# Altium PCB LDO_pcb.PcbDoc
Units mm, origin at the board's own origin, x right, y up, seen from the top; angles counter-clockwise.
Board outline 28.75 x 11.75 mm, 2 copper layers (Top Layer, Bottom Layer); 5 components, 3 nets, 17 pads, 4 vias.
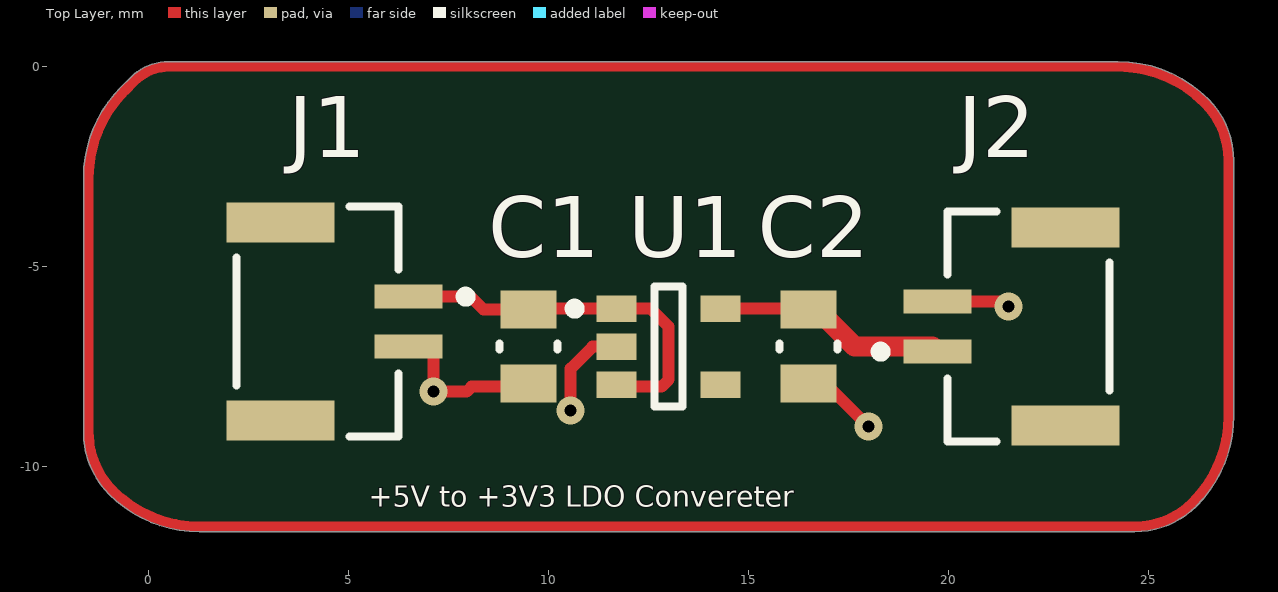
[diagram p0: Top Layer view]
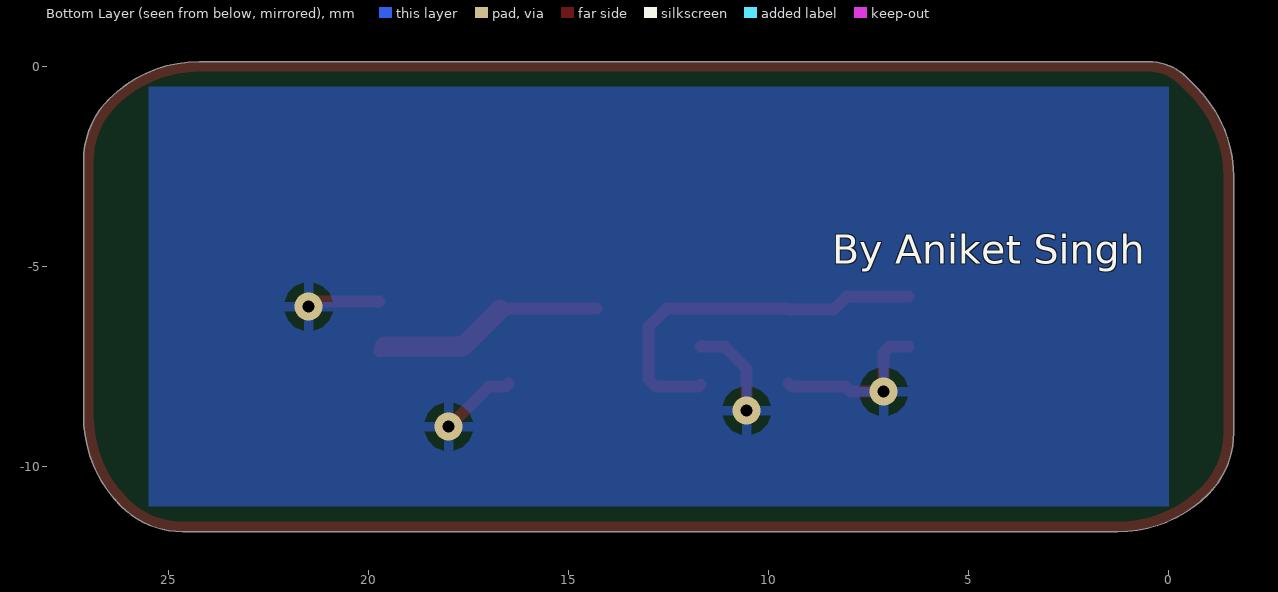
[diagram p1: Bottom Layer view, seen from below]
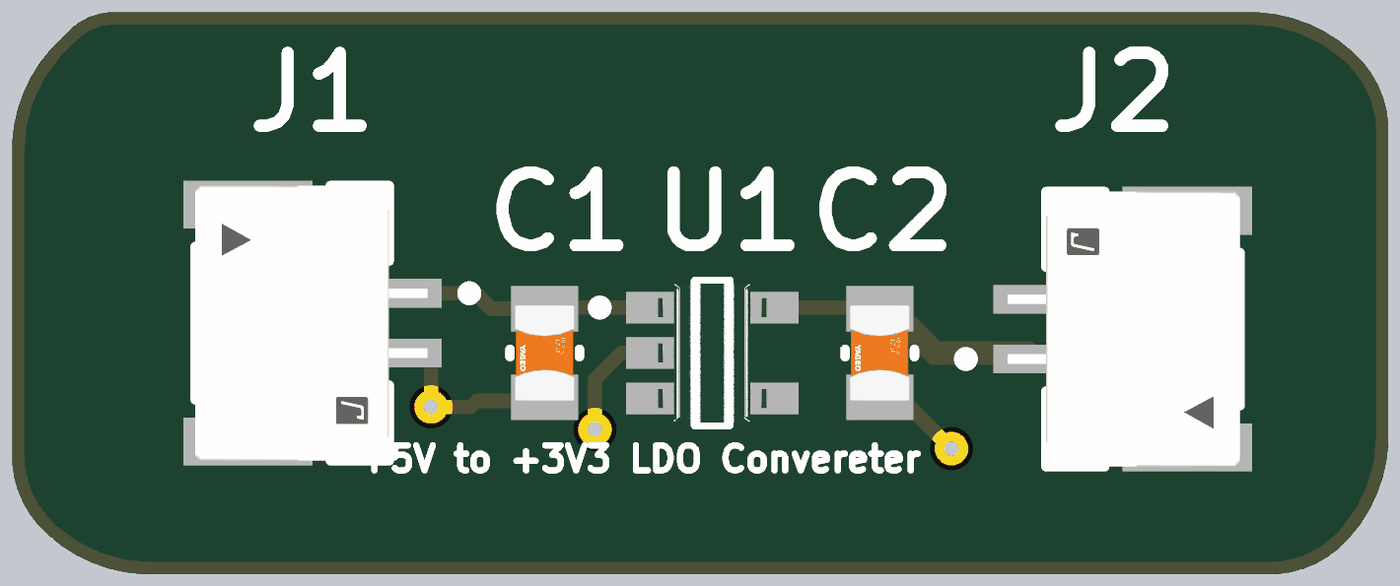
[diagram p2: 3D render of the assembled board from above, using the file's embedded part models]

## Layer stack, top to bottom
Top Solder: solder mask 0.0102, Solder Resist, Dk 3.5
Top Layer: signal copper 0.0356
Dielectric 1: dielectric 0.32, FR-4, Dk 4.8
Bottom Layer: signal copper 0.0356
Bottom Solder: solder mask 0.0102, Solder Resist, Dk 3.5

## Board outline
-1.627,-9.149 -1.627,-2.77 cw(c1.566,-2.77) -0.692,-0.512 -0.444,-0.263 cw(c0.5,-1.207) 0.5,0.127 24.23,0.127 cw(c24.23,-3.066) 26.488,-0.808 cw(c24.945,-2.351) 27.127,-2.351 27.127,-8.73 cw(c23.934,-8.73) 26.192,-10.988 cw(c24.649,-9.445) 24.649,-11.627 1.27,-11.627 cw(c1.27,-8.434) -0.988,-10.692 cw(c0.555,-9.149)

## Design rules (kind name [scope] priority, off if disabled: settings)
Clearance [All] p1: gap=0.254 ignorepadtopadclearanceinfootprint=FALSE
PolygonConnect [All] p1: connectstyle=Relief reliefconductorwidth=0.254 reliefentries=4 polygonreliefangle="90 Angle" airgapwidth=0.254
RoutingVias [All] p1: holewidth=0.711 width=1.27 viastyle="Through Hole" minholewidth=0.711 minwidth=1.27 maxholewidth=0.711 maxwidth=1.27
SolderMaskExpansion [All] p1: expansion=0.102 istentingtop=FALSE
SupplyNets "Schematic Supply Nets_2" [InNet('GND')] p1: voltage=0.000
SupplyNets "Schematic Supply Nets_1" [InNet('+3V3')] p2: voltage=0.000
SupplyNets "Schematic Supply Nets" [InNet('+5V')] p3: voltage=0.000
Width [All] p1: maxlimit=0.5 minlimit=0.254 preferedwidth=0.3
30 further rules are at their usual default settings.

## Components (designator, comment, footprint, x,y, rotation, side; value= is the part's Value field where it differs from the comment)
C1 "1u" FP-CC0805-0_85-MFG 9.5,-7 r270 top value="1 uF"
C2 "1u" FP-CC0805-0_85-MFG 16.5,-7 r270 top value="1 uF"
J1 "SM02B-GHS-TB(LF)(SN)" FP-SM02B-GHS-TB_LF_SN-MFG 4.225,-6.375 r270 top
J2 "SM02B-GHS-TB(LF)(SN)" FP-SM02B-GHS-TB_LF_SN-MFG 22,-6.5 r90 top
U1 "MIC5317-3.3YM5-TR" FP-SOT23-5LD-PL-1-MFG 13,-7 r0 top

## Footprints (in the part's own frame and the unit in brackets; to place one, negate y for a bottom-side part, rotate by r counter-clockwise, add the part's x,y. Pads: shape width x height; smd on the part's side, far side on the other; paste and mask are expansions set on the pad)
FP-CC0805-0_85-MFG [mm]
  rect 0.95x1.4 smd paste+0 mask+0: 1(-0.925,0) 2(0.925,0)
  silkscreen extent -0.08,-0.72 0.08,0.72, body extent -1.6,-1.05 1.6,1.05, height 0.25
FP-SM02B-GHS-TB_LF_SN-MFG [mm]
  rect 0.6x1.7 smd paste+0 mask+0: 1(-0.625,2.275) 2(0.625,2.275)
  rect 1x2.7 smd paste+0 mask+0: 3(-2.475,-0.925) 4(2.475,-0.925)
  silkscreen extent -2.88,-2.02 2.88,3.83, body extent -3.08,-2.37 3.08,3.22, height 0.25
FP-SOT23-5LD-PL-1-MFG [mm]
  rect 1x0.66 smd paste+0 mask+0: 1(-1.3,0.95) 2(-1.3,0) 3(-1.3,-0.95) 4(1.3,-0.95) 5(1.3,0.95)
  silkscreen extent -2.47,-1.5 0.35,1.5, body extent -1.9,-1.6 1.9,1.6, height 0.25

## Part data
C1 C2: library part CMP-03422-000182-1, "CAP CER 1UF 10V X7R 0805", Capacitance="1 uF", Manufacturer=Yageo, Manufacturer Part Number=CC0805KKX7R6BB105, Package=CC0805-0.85, Temperature="-30°C to +85°C", Temperature Characteristic=X7R, Temperature Range High=+85°C, Temperature Range Low=-30°C, Tolerance=0.1, Voltage Rating="10 V", Automotive=No, Category=Cap, ComponentLink2Description=Datasheet, ComponentLink2URL=http://www.yageo.com/documents/recent/UPY-GPHC_Y5V_6.3V-to-50V_8.pdf, Device Class L1="Passive Components", Device Class L2=Capacitors, Device Class L3="Ceramic Capacitors", Digikey Description="CAP CER 1UF 10V X7R 0805", Footprint Url=http://www.yageo.com/exep/pages/download/literatures/UPY-C_GEN_24.pdf, Height=0.95mm, Ipc Land Pattern Name=CAPC200125X85, Lead Free=Yes, Material=Ceramic, Mouser Description="Multilayer Ceramic Capacitors MLCC - SMD/SMT 1.0uF 10V X7R 10%", Octopart=https://octopart.com/cc0805kkx7r6bb105-yageo-42522859, RoHS=TRUE
J1 J2: library part CMP-2000-07076-2, "CONN HEADER SMD R/A 2POS 1.25MM", Color=Natural, Current Rating=1A, Package Quantity=2500, Voltage Rating=50V, Connector Type="Outer Shroud Contact", Contact Material=Bronze, Contact Plating=Tin, Contact Type="Male Pin", Fastening Type=Latch, Housing Color=Natural, Housing Material=Nylon, Lead Free="Lead Free", Mount="Surface Mount", Number of Contacts=2, Number of Positions=2, Number of Rows=1, Orientation="Right Angle", Packaging="Tape and Reel", Pitch=0.049inch, Series=GH, Termination=Solder
U1: library part CMP-06324-000116-1, "IC REG LINEAR 3.3V 150MA SOT23-5", Case/Package=SOT-23-5, Dropout Voltage=155mV, Max Input Voltage=6V, Max Operating Temperature=125°C, Min Current Limit=200mA, Min Input Voltage=2.5V, Min Operating Temperature=-40°C, Output Current=150mA, Output Voltage=3.3V, Package Quantity=3000, Power Supply Rejection Ratio (PSRR)=70dB, Mount="Surface Mount", Number of Outputs=1, Number of Regulators=1, Packaging="Tape and Reel", RoHS Compliant=No, Series=-

## Via types
v1: diameter 0.7, hole 0.3, Top Layer to Bottom Layer, 4 vias

## Nets (pads, with @x,y where several pads share a name; then routed paths per layer and width w, separated by ;. In a path a pad name is that pad's centre, name@x,y a point inside that pad or via, vN(x,y) a via of type N, cw(c..) or ccw(c..) an arc to the next point about the centre after c; other vN are vias at no path point)
+3V3: C2.1 J2.1 U1.5 | length 5.9
  Top Layer w0.3: U1.5 16.475,-6.05 C2.1 C2.1@16.725,-6.075 ; J2.1@19.6,-7 J2.1
  Top Layer w0.5: C2.1@16.725,-6.075 17.65,-7 J2.1@19.6,-7
+5V: C1.1 J1.1 U1.1 U1.3 | length 9.5
  Top Layer w0.3: J1.1 8.05,-5.75 8.375,-6.075 C1.1 9.525,-6.05 U1.1 12.55,-6.05 13,-6.5 13,-7.824 12.824,-8 11.75,-8 U1.3
GND: C1.2 C2.2 J1.2 J2.2 U1.2 | length 10.4
  Top Layer w0.3: J1.2 6.977,-7 7.127,-7.15 v1(7.127,-8.127) 7.95,-8.127 8.077,-8 9.425,-8 C1.2 ; v1(10.55,-8.6) 10.55,-7.55 11.1,-7 U1.2 ; C2.2 16.575,-8 17,-8 v1(18,-9) ; J2.2 21.264,-5.875 21.437,-6.048 v1@21.548,-6.048
  other v1: 21.5,-6
pads on no net: J1.3 J1.4 J2.3 J2.4 U1.4
copper on no net: | length 77.6
  Top Layer w0.254: 1,0 24.23,0 cw(c24.23,-3.066) 26.398,-0.898 cw(c24.945,-2.351) 27,-2.351 27,-8.73 cw(c23.934,-8.73) 26.102,-10.898 cw(c24.649,-9.445) 24.649,-11.5 1.27,-11.5 cw(c1.27,-8.434) -0.898,-10.602 cw(c0.555,-9.149) -1.5,-9.149 -1.5,-3.5 -1.5,-3 -1.5,-2.77 cw(c1.566,-2.77) -0.602,-0.602 -0.354,-0.354 cw(c0.5,-1.207) 0.5,0 3,0

## Polygon pours and split planes (outlines as drawn)
GND on Bottom Layer "GND_L02_P000" (solid, pour order 0): 0,-10.988 0,-0.5 25.5,-0.5 25.5,-10.988

## Silkscreen, mask and mechanical layers (free items; w line width, h text height)
Top Overlay:
  text "+5V to +3V3 LDO Convereter" at 5.5,-11 h0.52
Bottom Overlay:
  text "By Aniket Singh" at 8.408,-4.928 h0.72